# Altium PCB VOLTAGE_PEAK.PcbDoc
Units mil, origin at the board's own origin, x right, y up, seen from the top; angles counter-clockwise.
Board outline 1070 x 1165 mil, 2 copper layers (Top Layer, Bottom Layer); 17 components, 12 nets, 52 pads, 0 vias.
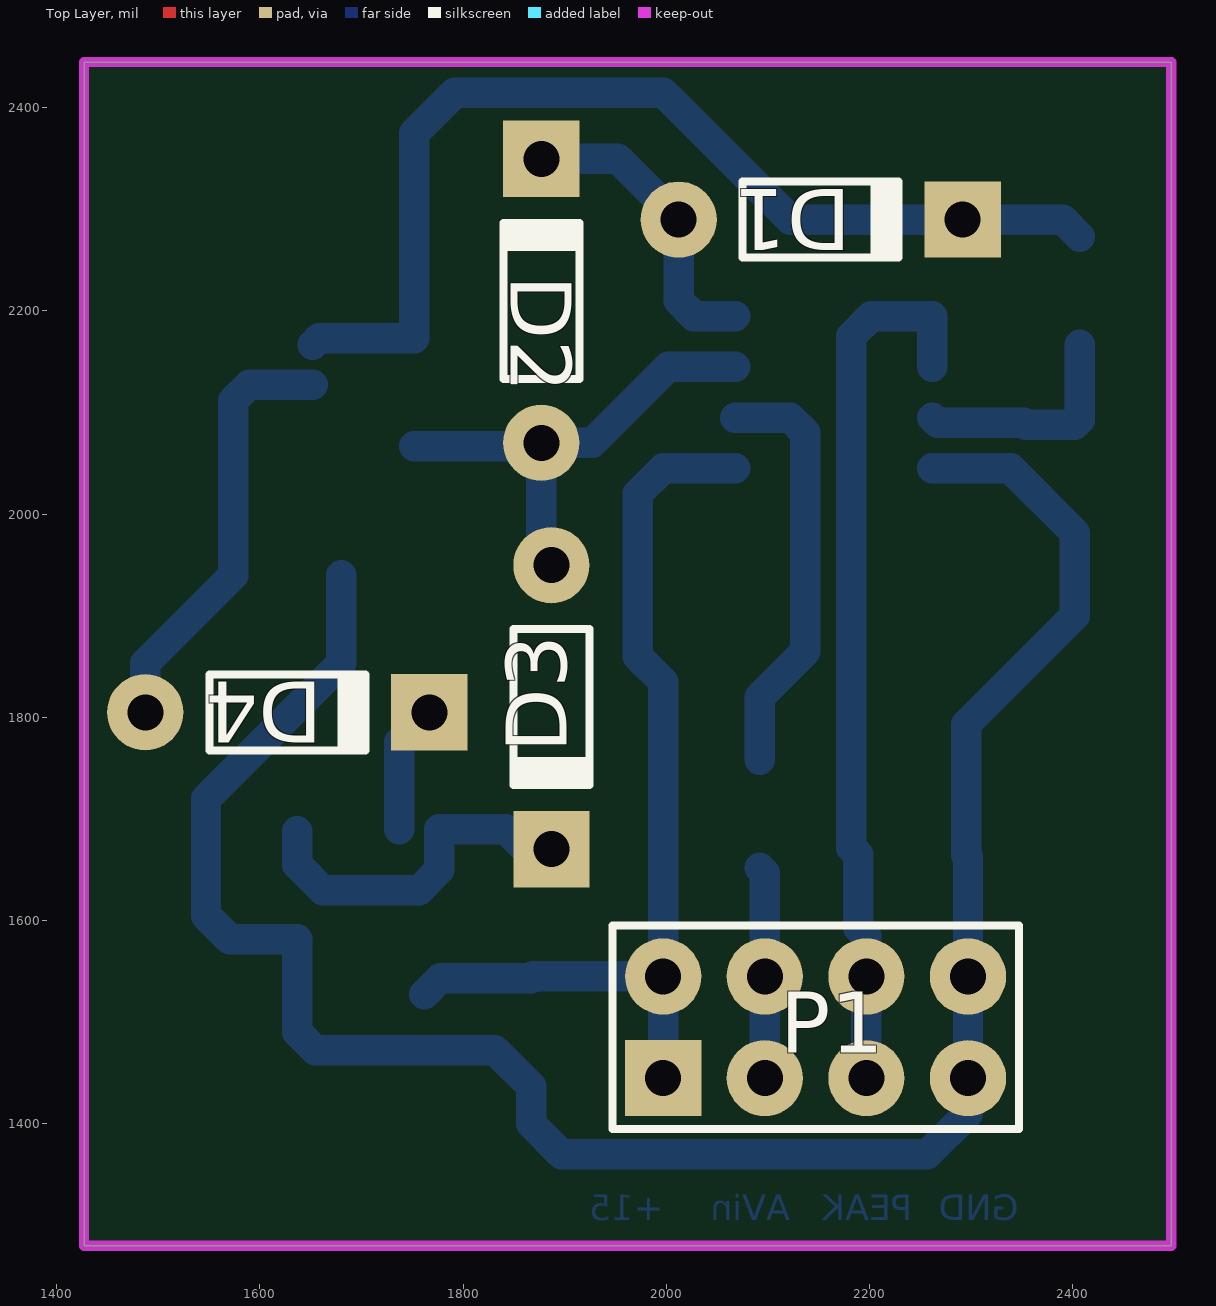
[diagram p0: Top Layer view]
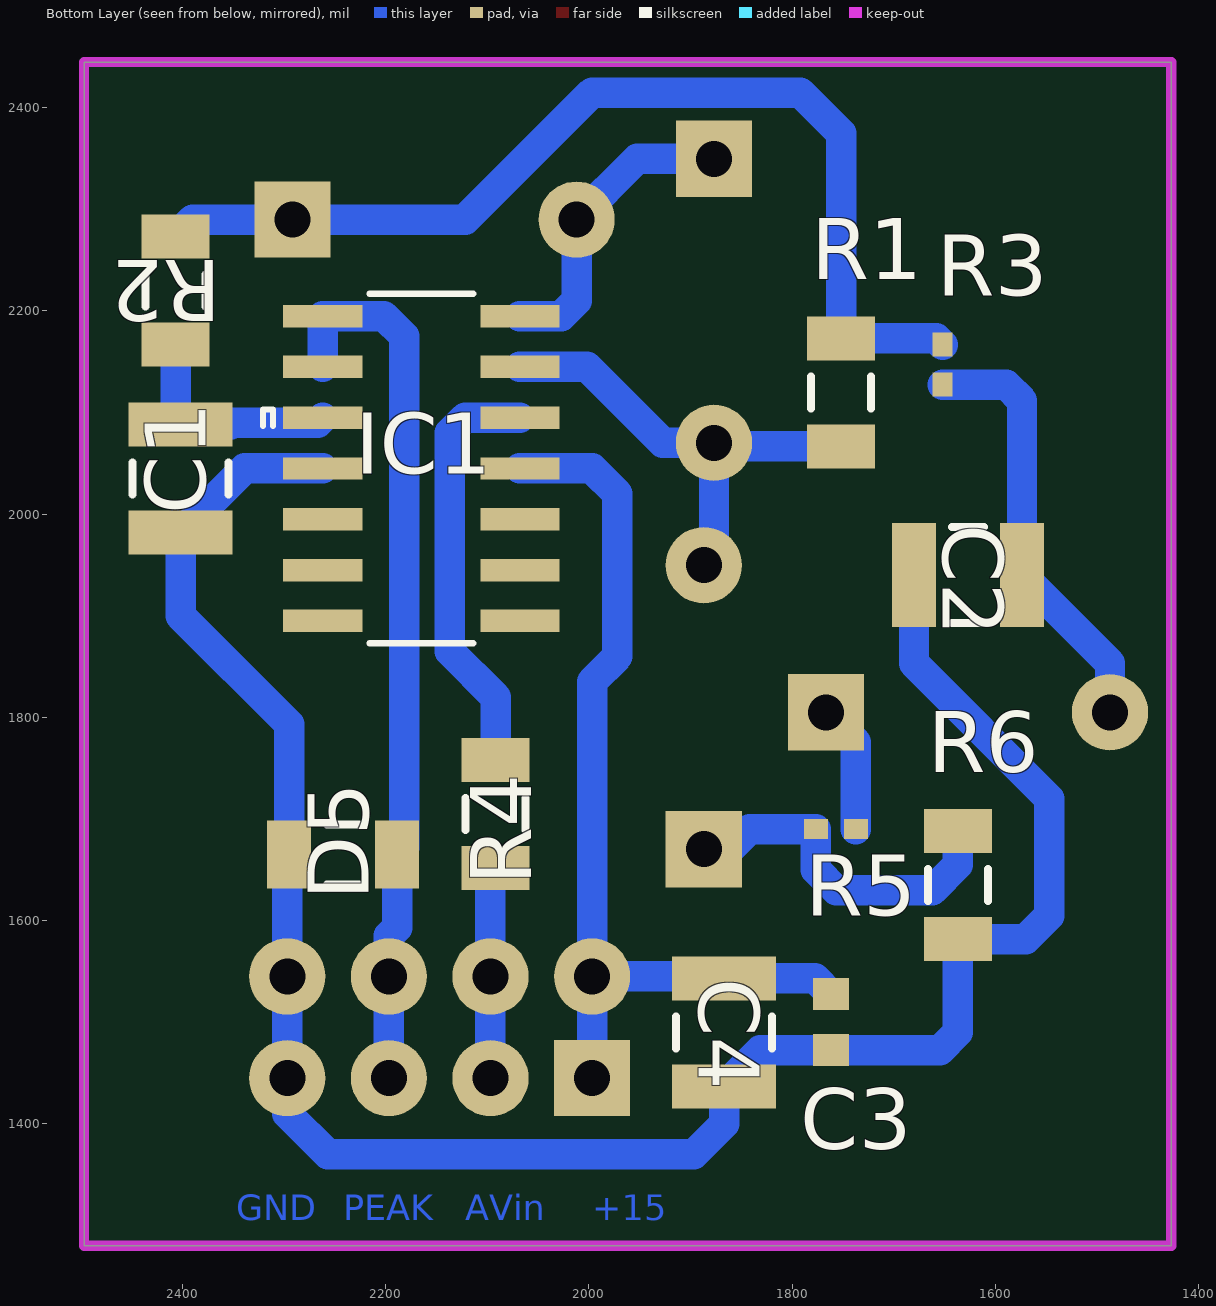
[diagram p1: Bottom Layer view, seen from below]

## Layer stack, top to bottom
Top Solder: solder mask 0.4, Solder Resist, Dk 3.5
Top Layer: signal copper 1.4
Dielectric 1: dielectric 12.6, FR-4, Dk 4.8
Bottom Layer: signal copper 1.4
Bottom Solder: solder mask 0.4, Solder Resist, Dk 3.5

## Board outline
2496.85,1280 2496.85,2445 1426.85,2445 1426.85,1280

## Design rules (kind name [scope] priority, off if disabled: settings)
Clearance [All] p1: gap=5 ignorepadtopadclearanceinfootprint=FALSE except(0: Arc-Hole Track-Hole SMDPad-Hole THPad-Hole Via-Hole Fill-Hole Poly-Hole Region-Hole Text-Hole; 10: Arc-Text Track-Text SMDPad-THPad SMDPad-Text THPad-Via THPad-Text Via-Text Fill-Text Poly-Text Region-Text Text-Text)
PolygonConnect [All] p1: connectstyle=Relief reliefconductorwidth=30 reliefentries=4 polygonreliefangle="90 Angle" airgapwidth=20
RoutingVias [All] p1: holewidth=28 width=50 viastyle="Through Hole" minholewidth=28 minwidth=50 maxholewidth=28 maxwidth=50
SolderMaskExpansion [All] p1: expansion=4
Width [All] p1: maxlimit=30 minlimit=10 preferedwidth=30 minimp=50.000000 maximp=50.000000 favimp=50.000000
30 further rules are at their usual default settings.

## Classes and differential pairs
component class task4_PP: C1 C2 C3 C4 D1 D3 D4 D5 IC1 P1 R1 R2 R3 R4 R5 R6

## Components (designator, comment, footprint, x,y, rotation, side; value= is the part's Value field where it differs from the comment)
C1 "Cap" C1210 2401.85,2035 r270 bottom value=2.2uF
C2 "Cap" C1210 1626.85,1940 r0 bottom value=100uF
C3 "Cap" 1608[0603] 1761.85,1500 r90 bottom value=0.1uF
C4 "Cap" C1210 1866.85,1490 r270 bottom value=10uF
D1 "Diode 1N4148" DO-35 2151.85,2290 r0 top
D2 "1N4148" DO-35 1876.85,2210 r90 top
D3 "1N4148" DO-35 1886.85,1810 r270 top
D4 "Diode 1N4148" DO-35 1626.85,1805 r0 top
D5 "D Zener" C1206 2241.85,1665 r180 bottom
IC1 "TLC274BIDR" SOIC127P600X175-14N 2164.85,2045 r0 bottom
P1 "Header 4X2" HDR2X4 1996.85,1445 r0 top
R1 "Res2" C1206 1751.61,2120 r270 bottom value=100k
R2 "Res2" C1206 2406.85,2220 r90 bottom value=10k
R3 "Res2" 0402 1651.85,2147.17 r90 bottom value=1ohm
R4 "Res2" C1206 2091.85,1705 r90 bottom value=100k
R5 "Res2" 0402 1756.85,1690 r0 bottom value=1ohm
R6 "Res2" C1206 1636.85,1635 r90 bottom value=1k

## Footprints (in the part's own frame and the unit in brackets; to place one, negate y for a bottom-side part, rotate by r counter-clockwise, add the part's x,y. Pads: shape width x height; smd on the part's side, far side on the other; paste and mask are expansions set on the pad)
0402 [mm] "Chip Capacitor, Body 1.0x0.5mm, IPC High Density"
  rect 0.6x0.5 smd: 1(-0.5,0) 2(0.5,0)
  body extent -0.55,-0.3 0.55,0.3, height 1.3
1608[0603] [mm] "Chip Capacitor, Body 1.6x0.8mm, IPC High Density"
  rect 0.8x0.9 smd: 1(-0.7,0) 2(0.7,0)
  body extent -0.87,-0.48 0.87,0.48, height 1.3
C1206 [mm] "Chip Capacitor, Body 3.2x1.6mm, IPC High Density"
  rect 1.1x1.7 smd: 1(-1.35,0) 2(1.35,0)
  silkscreen extent -0.4,-0.75 0.4,0.75, body extent -1.7,-0.9 1.7,0.9, height 1.3
C1210 [mm] "Chip Capacitor, Body 3.2x2.5mm, IPC High Density"
  rect 1.1x2.6 smd: 1(-1.35,0) 2(1.35,0)
  silkscreen extent -0.4,-1.2 0.4,1.2, body extent -1.7,-1.35 1.7,1.35, height 1.3
DO-35 [mm] "Diode, Axial; Body 3.8 x 1.9 mm (LxDia. max), Lead Dia. 0.53 mm (max)"
  round 1.905 hole 0.9: 1(-3.55,0)
  rect 1.905x1.905 hole 0.9: 2(3.55,0)
  silkscreen extent -1.95,-0.95 2.05,0.95
HDR2X4 [mm] "Connector; Header; 4x2 Position"
  rect 1.905x1.905 hole 0.9: 1(0,0)
  round 1.905 hole 0.9: 2(0,2.54) 3(2.54,0) 4(2.54,2.54) 5(5.08,0) 6(5.08,2.54) 7(7.62,0) 8(7.62,2.54)
  silkscreen extent -1.27,-1.27 8.89,3.81
SOIC127P600X175-14N [mil]
  rect 78x22 smd: 1(-97,150) 2(-97,100) 3(-97,50) 4(-97,0) 5(-97,-50) 6(-97,-100) 7(-97,-150) 8(97,-150) 9(97,-100) 10(97,-50) 11(97,0) 12(97,50) 13(97,100) 14(97,150)
  silkscreen extent -51,-172 156,172

## Part data
C1 C2 C3 C4: "Capacitor", LatestRevisionDate=17-Jul-2002, LatestRevisionNote="Re-released for DXP Platform.", PackageDescription="Radial Cap, Thru-Hole; 2 Leads; 0.3 in Pin Spacing", PackageReference=RAD-0.3, Published=8-Jun-2000, Publisher="Altium Limited"
D1 D4: "High Conductance Fast Diode", Code_JEDEC=DO-204-AH, ComponentLink1Description="Manufacturer Link", ComponentLink1URL=http://www.fairchildsemi.com/, ComponentLink2Description=Datasheet, ComponentLink2URL=http://www.fairchildsemi.com/ds/1N%2F1N4148.pdf, DatasheetVersion=1997, LatestRevisionDate=17-Jul-2002, LatestRevisionNote="Re-released for DXP Platform.", PackageDescription="Diode, Axial; Body 3.8 x 1.9 mm (LxDia. max), Lead Dia. 0.53 mm (max)", PackageReference=DO-35, Published=8-Jun-2000, Publisher="Altium Limited"
D2 D3: library part "Diode 1N4148", "High Conductance Fast Diode", Code_JEDEC=DO-204-AH, ComponentLink1Description="Manufacturer Link", ComponentLink1URL=http://www.fairchildsemi.com/, ComponentLink2Description=Datasheet, ComponentLink2URL=http://www.fairchildsemi.com/ds/1N%2F1N4148.pdf, DatasheetVersion=1997, LatestRevisionDate=17-Jul-2002, LatestRevisionNote="Re-released for DXP Platform.", PackageDescription="Diode, Axial; Body 3.8 x 1.9 mm (LxDia. max), Lead Dia. 0.53 mm (max)", PackageReference=DO-35, Published=8-Jun-2000, Publisher="Altium Limited"
D5: "Zener Diode", LatestRevisionDate=17-Jul-2002, LatestRevisionNote="Re-released for DXP Platform.", PackageDescription="Diode, Thru-Hole; 2 Leads; 0.7 in Pin Spacing", PackageReference=DIODE-0.7, Published=8-Jun-2000, Publisher="Altium Limited"
IC1: "Integrated Circuit", Manufacturer_Name="Texas Instruments", Mouser Part Number=595-TLC274BIDR, RS Part Number=6610212, Datasheet Link=http://www.ti.com/lit/gpn/TLC274B, Manufacturer_Part_Number=TLC274BIDR, Mouser Price/Stock=https://www.mouser.com/Search/Refine.aspx?Keyword=595-TLC274BIDR, RS Price/Stock=https://uk.rs-online.com/web/p/products/6610212
P1: "Header, 4-Pin, Dual row", LatestRevisionDate=17-Jul-2002, LatestRevisionNote="Re-released for DXP Platform.", Publisher="Altium Limited"
R1 R2 R3 R4 R5 R6: "Resistor", LatestRevisionDate=17-Jul-2002, LatestRevisionNote="Re-released for DXP Platform.", PackageDescription="Axial Device, Thru-Hole; 2 Leads; 0.4 in Pin Spacing", PackageReference=AXIAL-0.4, Published=8-Jun-2000, Publisher="Altium Limited"

## Nets (pads, with @x,y where several pads share a name; then routed paths per layer and width w, separated by ;. In a path a pad name is that pad's centre, name@x,y a point inside that pad or via, vN(x,y) a via of type N, cw(c..) or ccw(c..) an arc to the next point about the centre after c; other vN are vias at no path point)
+15: C3.2 C4.1 IC1.4 P1.1 P1.2 | length 933.9
  Bottom Layer w30: C3.2 1777.44,1543.15 C4.1 1868.7,1545 P1.2 ; P1.1 P1.2 ; IC1.4 1996.85,2045 1971.85,2020 1971.85,1860 1996.85,1835 P1.2
AVin: P1.3 P1.4 R4.1 | length 208.9
  Bottom Layer w30: R4.1 2096.85,1646.85 P1.4 P1.3
GND: C1.2 C2.2 C3.1 C4.2 D5.1 IC1.11 P1.7 P1.8 R6.1 | length 2112.5
  Bottom Layer w30: C2.2 1680,1853.15 1546.85,1720 1546.85,1605 1570,1581.85 R6.1 1636.85,1490 1654.41,1472.44 C3.1 1831.26,1472.44 C4.2 1866.85,1400 1896.85,1370 2256.85,1370 2296.85,1410 P1.7 P1.8 2296.85,1663.15 D5.1 2295,1793.15 2401.85,1900 C1.2 2338.7,2045 IC1.11
NetC1_1: C1.1 IC1.10 R2.1 | length 223.6
  Bottom Layer w30: IC1.10 2266.85,2090 2351.85,2090 2353.7,2088.15 C1.1 2406.85,2093.15 R2.1
NetC2_1: C2.1 D4.1 R3.1 | length 427.4
  Bottom Layer w30: D4.1 1487.09,1853.39 C2.1 1573.7,2111.85 1589.33,2127.48 R3.1
NetD1_1: D1.1 D2.2 IC1.7 | length 302
  Bottom Layer w30: D2.2 1952.32,2349.76 D1.1 2012.09,2210 2027.09,2195 IC1.7
NetD2_1: D2.1 D3.1 IC1.6 R1.2 | length 491.4
  Bottom Layer w30: R1.2 1873.46,2066.85 D2.1 ; D3.1@1868.7,1949.76 D3.1 1876.85,1959.76 D2.1 ; IC1.6 2001.85,2145 1927.09,2070.24 D2.1
NetD3_2: D3.2 R5.2 R6.2 | length 350
  Bottom Layer w30: R6.2 1636.85,1655 1661.85,1630 1756.61,1630 1776.54,1649.92 R5.2 1841.85,1690 1861.61,1670.24 D3.2
NetD4_2: D4.2 R5.1 | length 127.2
  Bottom Layer w30: R5.1 1737.17,1775.55 D4.2
NetIC1_5: IC1.5 R4.2 | length 415.7
  Bottom Layer w30: IC1.5 2121.85,2095 2136.85,2080 2136.85,1865 2091.85,1820 R4.2
OKpeak: D5.2 IC1.8 IC1.9 P1.5 P1.6 | length 874.5
  Bottom Layer w30: P1.5 P1.6 2196.85,1585 2188.7,1593.15 D5.2 2181.85,1671.85 2181.85,2175 2201.85,2195 IC1.8 IC1.9
Peak: D1.2 R1.1 R2.2 R3.2 | length 1034.6
  Bottom Layer w30: R3.2 1658.15,2173.15 R1.1 1751.61,2374.76 1791.85,2415 1996.85,2415 2121.85,2290 D1.2 2390,2290 R2.2
pads on no net: IC1.1 IC1.2 IC1.3 IC1.12 IC1.13 IC1.14

## Keep-outs
Keep-Out Layer:
  lines w10: 1426.85,1280 2496.85,1280 2496.85,1632.5 2496.85,2077.5 2496.85,2270.62 2496.85,2416.88 2496.85,2445 1426.85,2445 1426.85,1280

## Other copper
Bottom Layer:
  text "+15" at 1996.85,1305 h25
  text "AVin" at 2121.85,1305 h25
  text "PEAK" at 2241.85,1305 h25
  text "GND" at 2346.85,1305 h25